# Altium PCB HL2SS.PcbDoc
Units mil, origin at the board's own origin, x right, y up, seen from the top; angles counter-clockwise.
Board outline 2204.72 x 3622.05 mil, 2 copper layers (Top Layer, Bottom Layer); 27 components, 23 nets, 79 pads, 16 vias.
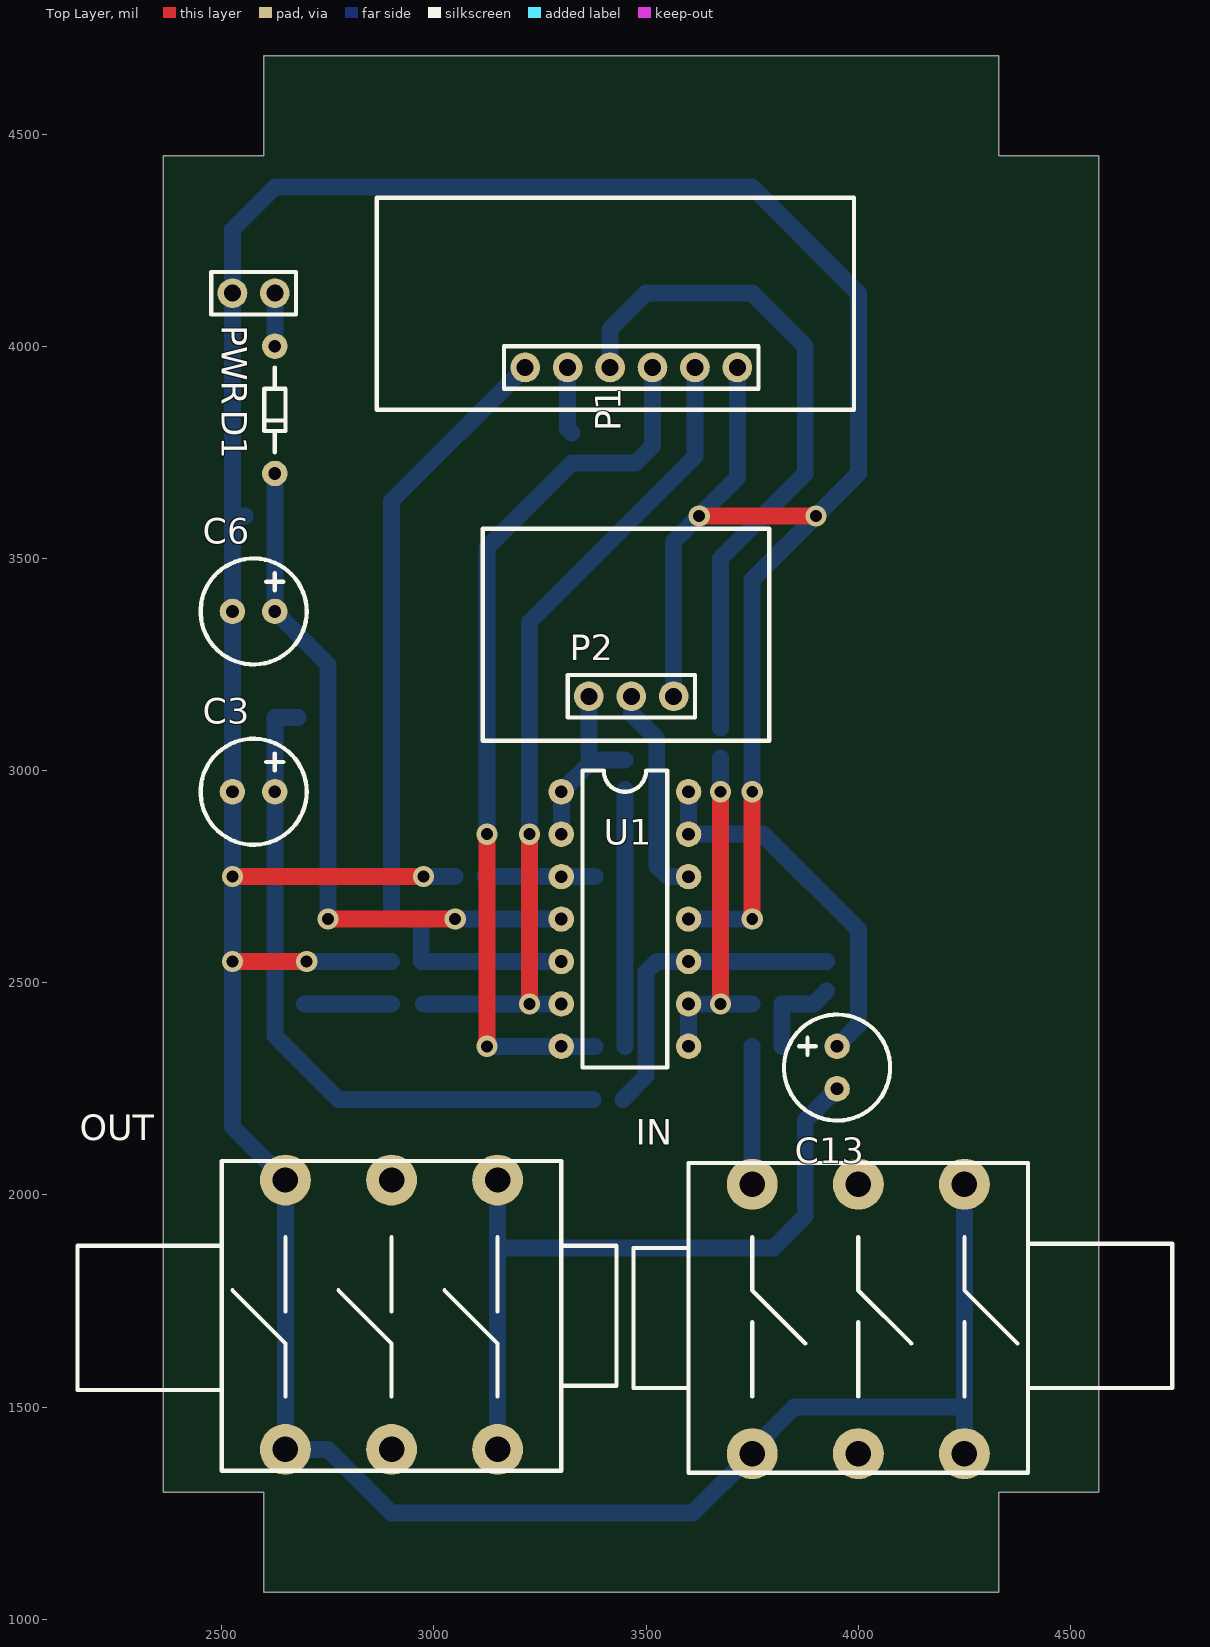
[diagram p0: Top Layer view]
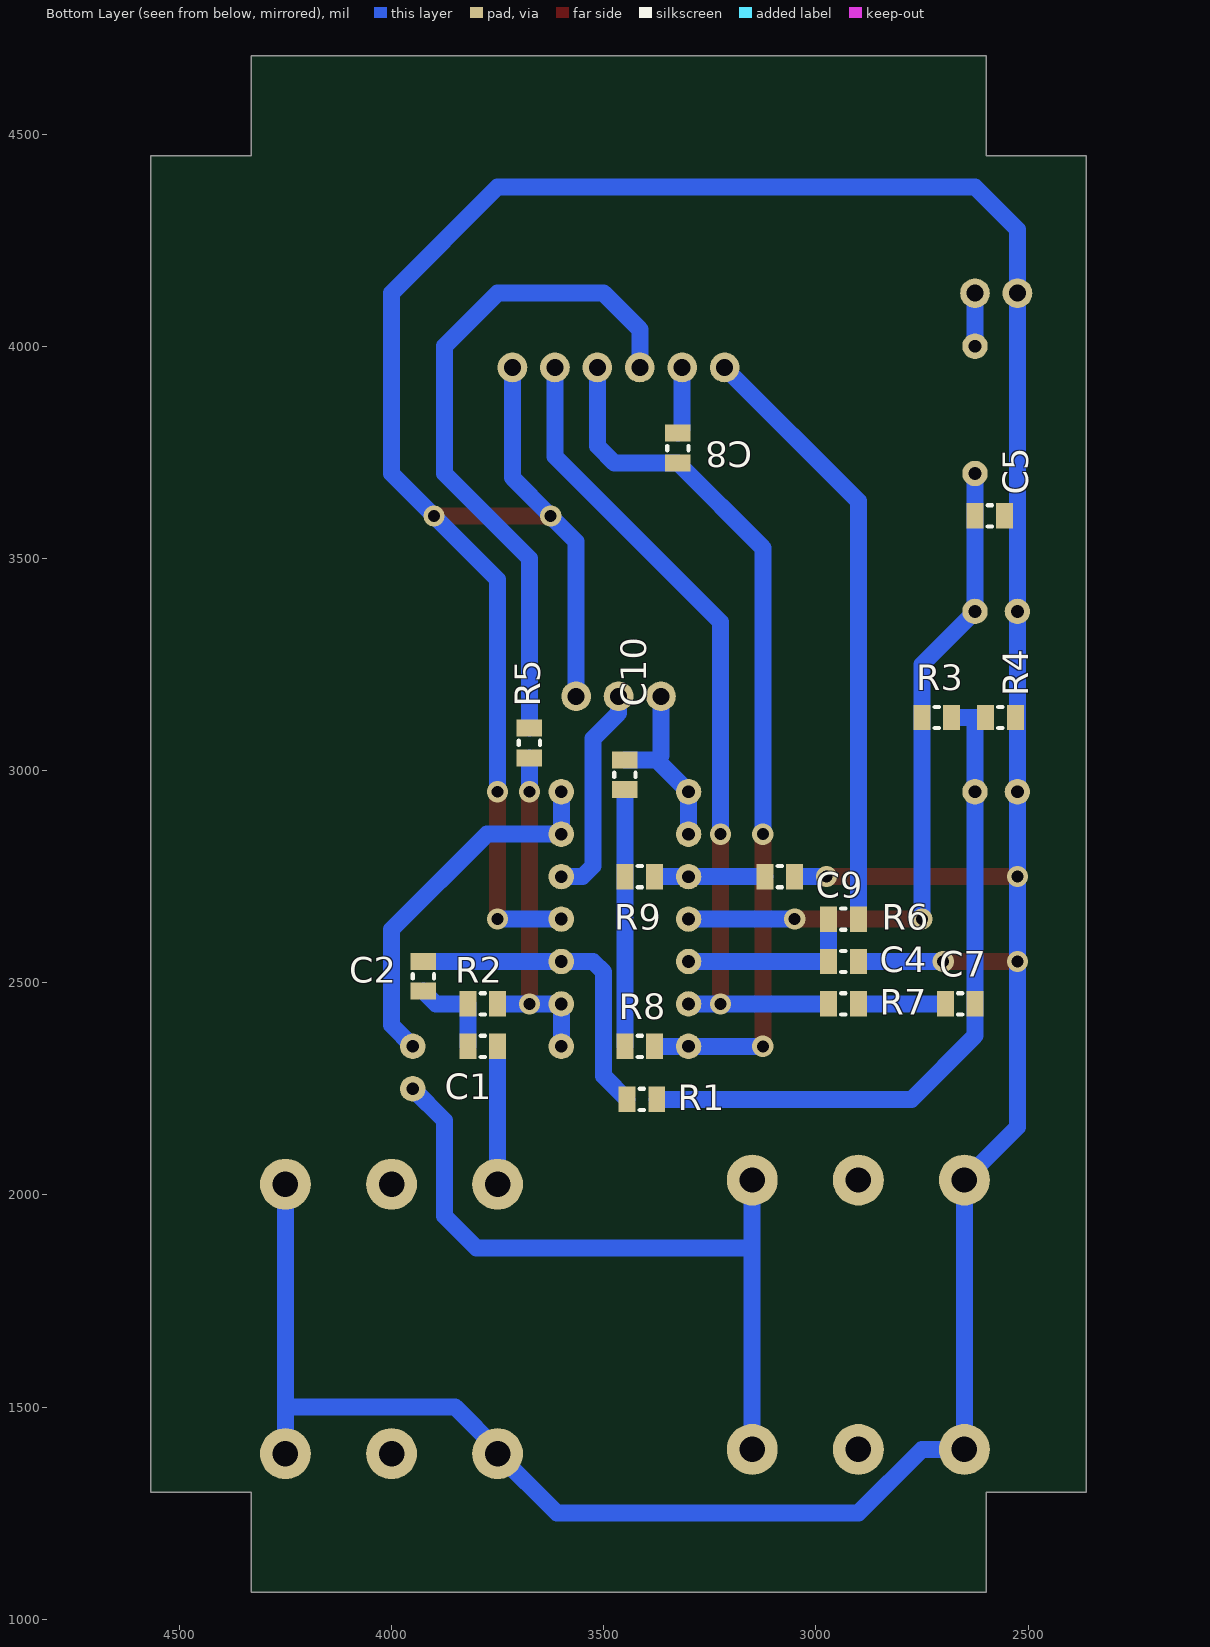
[diagram p1: Bottom Layer view, seen from below]
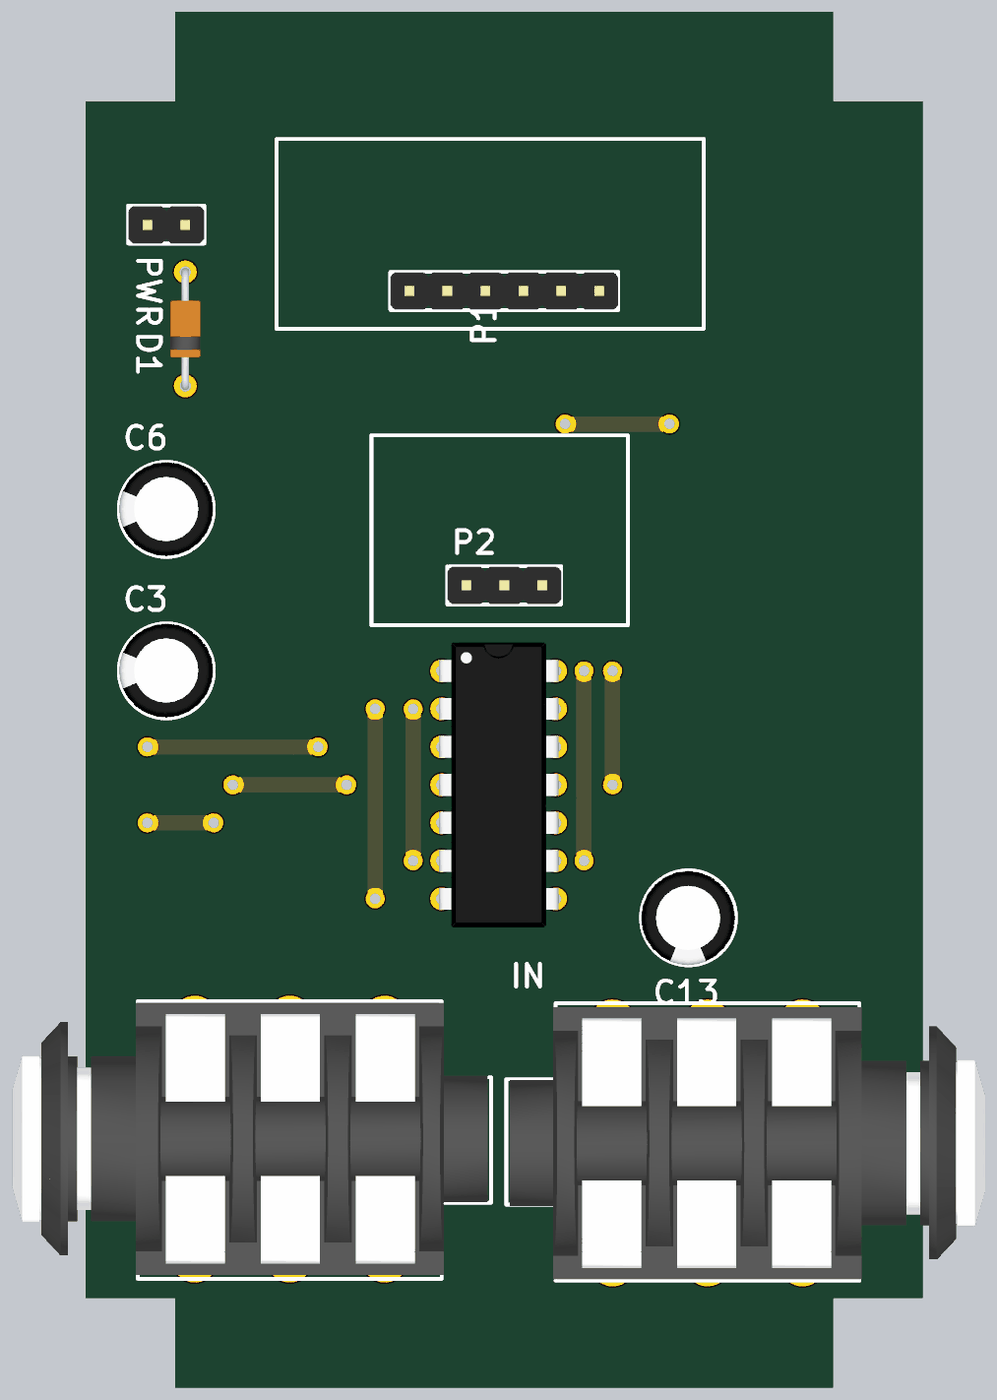
[diagram p2: 3D render of the assembled board from above, using the file's embedded part models]
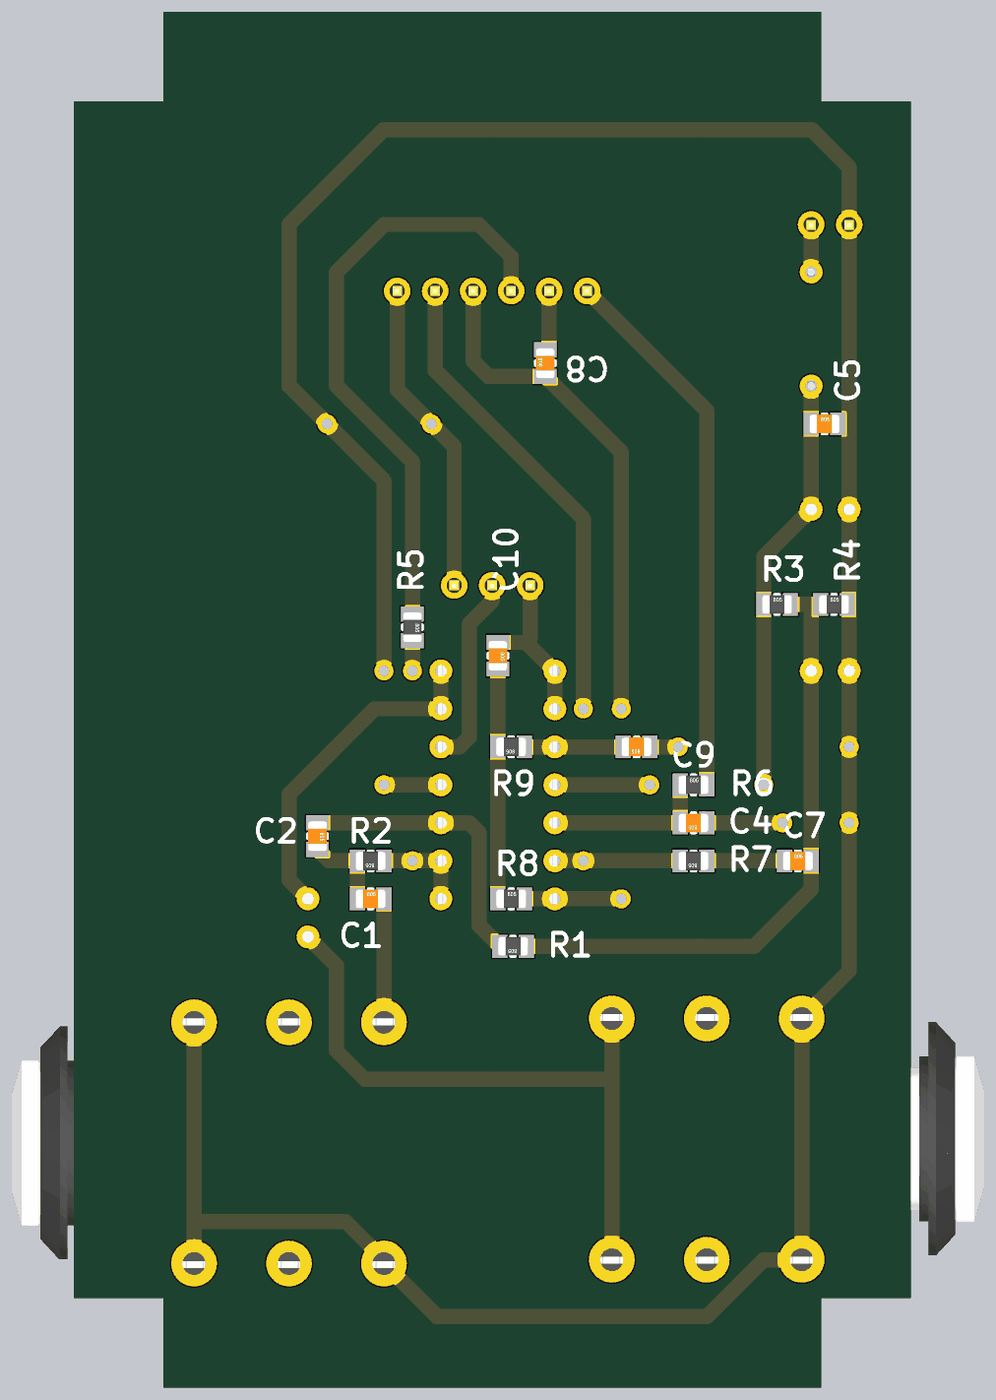
[diagram p3: 3D render of the assembled board from below, using the file's embedded part models]

## Layer stack, top to bottom
Top Solder: solder mask 0.4, Solder Resist, Dk 3.5
Top Layer: signal copper 1.4
Dielectric 1: dielectric 12.6, FR-4, Dk 4.8
Bottom Layer: signal copper 1.4
Bottom Solder: solder mask 0.4, Solder Resist, Dk 3.5

## Board outline
2362.2,1299.21 2362.2,4448.82 2598.43,4448.82 2598.43,4685.04 4330.71,4685.04 4330.71,4448.82 4566.93,4448.82 4566.93,1299.21 4330.71,1299.21 4330.71,1062.99 2598.43,1062.99 2598.43,1299.21

## Design rules (kind name [scope] priority, off if disabled: settings)
Clearance [All] p1: gap=10
PolygonConnect [All] p1: connectstyle=Relief reliefconductorwidth=10 reliefentries=4 polygonreliefangle="90 Angle" airgapwidth=10
RoomDefinition HL2SS [InComponentClass('HL2SS')] p1 off: confinementstyle=ConfineIn formatcopy=TRUE lockcomponents=FALSE outline 2362.2,1065 4575,1065 4575,4685.04 2362.2,4685.04
RoutingVias [All] p1: holewidth=28 width=50 viastyle="Through Hole" minholewidth=28 minwidth=50 maxholewidth=28 maxwidth=50
SilkToBoardRegionClearance [All] p1 off:
SolderMaskExpansion [All] p1: expansion=4
Width [All] p1: maxlimit=80 minlimit=40 preferedwidth=40
28 further rules are at their usual default settings.

## Components (designator, comment, footprint, x,y, rotation, side; value= is the part's Value field where it differs from the comment)
C1 "Capacitor" 0805_Capacitor 3745,2350 r270 bottom
C2 "Capacitor" 0805_Capacitor 3925,2475 r0 bottom
C3 "Electrolytic Capacitor" ELEC_RAD10 2625,2950 r180 top
C4 "Capacitor" 0805_Capacitor 2975,2550 r90 bottom
C5 "Capacitor" 0805_Capacitor 2550,3600 r270 bottom
C6 "Electrolytic Capacitor" ELEC_RAD10 2625,3375 r180 top
C7 "Capacitor" 0805_Capacitor 2620,2450 r270 bottom
C8 "Capacitor" 0805_Capacitor 3325,3800 r180 bottom
C9 "Capacitor" 0805_Capacitor 3125,2750 r90 bottom
C10 "Capacitor" 0805_Capacitor 3450,2950 r0 bottom
C13 "Electrolytic Capacitor" ELEC_RAD10 3950,2350 r270 top
D1 "Diode" DO35 2625,4000 r270 top
IN "Jack 6.3" "Jack 6.3" 4250,2025 r270 top
OUT "Jack 6.3" "Jack 6.3" 2650,1400 r90 top
P1 "SIL-CONN-6" SIL-CONN-6 3215,3950 r90 top
P2 "SIL-CONN-3" SIL-CONN-3 3365,3175 r90 top
PWR "SIL-CONN-2" SIL-CONN-2 2625,4125 r270 top
R1 "Resistor" 0805_Resistor 3450,2225 r90 bottom
R2 "Resistor" 0805_Resistor 3825,2450 r90 bottom
R3 "Resistor" 0805_Resistor 2675,3125 r270 bottom
R4 "Resistor" 0805_Resistor 2525,3125 r270 bottom
R5 "Resistor" 0805_Resistor 3675,3025 r0 bottom
R6 "Resistor" 0805_Resistor 2895,2650 r270 bottom
R7 "Resistor" 0805_Resistor 2975,2450 r90 bottom
R8 "Resistor" 0805_Resistor 3375,2350 r270 bottom
R9 "Resistor" 0805_Resistor 3455,2750 r90 bottom
U1 "TL074" DIP14 3300,2950 r0 top

## Footprints (in the part's own frame and the unit in brackets; to place one, negate y for a bottom-side part, rotate by r counter-clockwise, add the part's x,y. Pads: shape width x height; smd on the part's side, far side on the other; paste and mask are expansions set on the pad)
0805_Capacitor [mil]
  rect 60x40 smd: 1(0,-5) 2(0,-75)
  silkscreen extent -25,-45 25,-35, body extent -25,-79 25,-1, height 31
0805_Resistor [mil]
  rect 60x40 smd: 1(0,-5) 2(0,-75)
  silkscreen extent -25,-45 25,-35, body extent -25,-79 25,-1, height 31
DIP14 [mil]
  round 60 hole 30: 1(0,0) 2(0,-100) 3(0,-200) 4(0,-300) 5(0,-400) 6(0,-500) 7(0,-600) 8(300,-600) 9(300,-500) 10(300,-400) 11(300,-300) 12(300,-200) 13(300,-100) 14(300,0)
  silkscreen extent 50,-650 250,50, body extent -7,-675 307,75, height 159
DO35 [mil]
  round 60 hole 30: A(0,0) K(300,0)
  silkscreen extent 50,-25 250,25, body extent -10,-40 310,40, height 87
ELEC_RAD10 [mil]
  round 60 hole 30: +(0,0) -(100,0)
  silkscreen extent -75,-125 175,125, body extent -74,-125 174,123, height 433
"Jack 6.3" [mil]
  round 120 hole 60: 1(0,-500) 2(635,-500) 3(0,0) 4(635,0) 5(0,-250) 6(635,-250)
  silkscreen extent -50,-780 680,490, body extent -40,-771 677,481, height 657
SIL-CONN-2 [mil]
  round 70 hole 40: 1(0,0) 2(0,-100)
  silkscreen extent -50,-150 50,50, body extent -48,-150 50,50, height 336
SIL-CONN-3 [mil]
  round 70 hole 40: 1(0,0) 2(0,-100) 3(0,-200)
  silkscreen extent -50,-250 50,50, body extent -49,-250 49,50, height 336
SIL-CONN-6 [mil]
  round 70 hole 40: 1(0,0) 2(0,-100) 3(0,-200) 4(0,-300) 5(0,-400) 6(0,-500)
  silkscreen extent -50,-550 50,50, body extent -49,-550 49,50, height 336

## Via types
v1: diameter 50, hole 28, Top Layer to Bottom Layer, 16 vias

## Nets (pads, with @x,y where several pads share a name; then routed paths per layer and width w, separated by ;. In a path a pad name is that pad's centre, name@x,y a point inside that pad or via, vN(x,y) a via of type N, cw(c..) or ccw(c..) an arc to the next point about the centre after c; other vN are vias at no path point)
GND: C3.- C4.2 C5.1 C6.- C9.2 IN.2 IN.3 IN.4 OUT.3 OUT.4 P1.6 P2.3 PWR.2 R4.1 U1.11 | length 10724
  Top Layer w40: v1(2525,2550) v1(2700,2550) ; v1(2525,2750) v1(2975,2750) ; v1(3625,3600) v1(3900,3600) ; v1(3750,2650) v1(3750,2950)
  Bottom Layer w40: C5.1 2525,3600 ; v1(2700,2550) C4.2 ; v1(2975,2750) C9.2 ; P2.3 3565,3540 v1(3625,3600) 3715,3690 P1.6 ; U1.11 v1(3750,2650) ; v1(3750,2950) 3750,3450 v1(3900,3600) 4000,3700 4000,4125 3750,4375 2625,4375 2525,4275 PWR.2 2525,3600 ; IN.4 4250,1500 ; IN.3 4250,1500 ; 2525,3600 C6.- v1(2525,2550) 2525,2160 OUT.4 OUT.3 2750,1400 2900,1250 3610,1250 IN.2 3750,1400 3850,1500 4250,1500
NetC1_1: C1.1 IN.1 | length 325
  Bottom Layer w40: IN.1 C1.1
NetC1_2: C1.2 C2.1 R2.1 | length 217.4
  Bottom Layer w40: C1.2 R2.1 3895,2450 C2.1
NetC2_2: C2.2 R1.1 U1.10 | length 758.1
  Bottom Layer w40: R1.1 3500,2280 3500,2525 3525,2550 U1.10 C2.2
NetC4_1: C4.1 R6.2 U1.5 | length 430
  Bottom Layer w40: R6.2 C4.1 U1.5
NetC7_2: C7.2 R7.2 | length 205
  Bottom Layer w40: C7.2 R7.2
NetC8_1: C8.1 P1.2 | length 159.1
  Bottom Layer w40: P1.2 3315,3805 C8.1
NetC8_2: C8.2 P1.4 R8.1 U1.7 | length 2104.4
  Top Layer w40: v1(3125,2350) v1(3125,2850)
  Bottom Layer w40: v1(3125,2350) U1.7 R8.1 ; v1(3125,2850) 3125,3525 C8.2 3475,3725 3515,3765 P1.4
NetC9_1: C9.1 R9.2 U1.3 | length 260
  Bottom Layer w40: C9.1 U1.3 R9.2
NetC10_1: C10.1 R8.2 R9.1 | length 605
  Bottom Layer w40: R8.2 R9.1 C10.1
NetC10_2: C10.2 P2.1 U1.1 U1.2 | length 421.1
  Bottom Layer w40: U1.2 U1.1 3375,3025 C10.2 ; 3365,3035 P2.1
NetC11_2: 
NetC12_2: 
NetC13_+: C13.+ U1.13 U1.14 | length 888.9
  Bottom Layer w40: U1.14 U1.13 3775,2850 4000,2625 4000,2400 C13.+
NetC13_-: C13.- OUT.1 OUT.2 | length 1722.1
  Bottom Layer w40: OUT.1 3150,1875 ; OUT.2 3150,1875 ; C13.- 3875,2175 3875,1950 3800,1875 3150,1875
NetD1_A: D1.A PWR.1 | length 125
  Bottom Layer w40: D1.A PWR.1
NetP1_1: P1.1 R6.1 | length 1430.5
  Bottom Layer w40: R6.1 2900,3635 P1.1
NetP1_3: P1.3 R5.2 | length 1619.8
  Bottom Layer w40: P1.3 3415,4040 3500,4125 3750,4125 3875,4000 3875,3700 3675,3500 R5.2
NetP1_5: P1.5 R7.1 U1.6 | length 1986.5
  Top Layer w40: v1(3225,2450) v1(3225,2850)
  Bottom Layer w40: R7.1@2975,2450 v1(3225,2450) U1.6 ; v1(3225,2850) 3225,3350 3615,3740 P1.5
NetP2_2: P2.2 U1.12 | length 510.2
  Bottom Layer w40: P2.2 3465,3135 3525,3075 3525,2775 3550,2750 U1.12
NetR2_2: R2.2 R5.1 U1.8 U1.9 | length 830
  Top Layer w40: v1(3675,2450) v1(3675,2950)
  Bottom Layer w40: U1.8 U1.9 v1(3675,2450) R2.2 ; v1(3675,2950) R5.1
VCC: C5.2 C6.+ D1.K R3.2 U1.4 | length 1651.8
  Top Layer w40: v1(2750,2650) v1(3050,2650)
  Bottom Layer w40: D1.K C5.2 C6.+ 2750,3250 R3.2 v1(2750,2650) ; v1(3050,2650) U1.4
VCC/2: C3.+ C7.1 R1.2 R3.1 R4.2 | length 1617.1
  Bottom Layer w40: R3.1 2625,3125 2625,2875 C7.1 2625,2375 2775,2225 R1.2
pads on no net: IN.5 IN.6 OUT.5 OUT.6

## Silkscreen, mask and mechanical layers (free items; w line width, h text height)
Top Overlay:
  lines w10: 2865,3850 2865,4350 3990,4350 3990,3850 2865,3850 ; 3115,3070 3115,3570 3790,3570 3790,3070 3115,3070
Mechanical 1:
  lines w10: 3464.57,1062.99 3464.57,4685.04 ; 2362.2,1299.21 2362.2,4448.82 2598.43,4448.82 2598.43,4685.04 4330.71,4685.04 4330.71,4448.82 4566.93,4448.82 4566.93,1299.21 4330.71,1299.21 4330.71,1062.99 2598.43,1062.99 2598.43,1299.21 2362.2,1299.21